# Altium PCB PCB2.PcbDoc
Units mil, origin at the board's own origin, x right, y up, seen from the top; angles counter-clockwise.
Board outline 6000 x 4000 mil, 2 copper layers (Top Layer, Bottom Layer); 11 components, 7 nets, 34 pads, 0 vias.
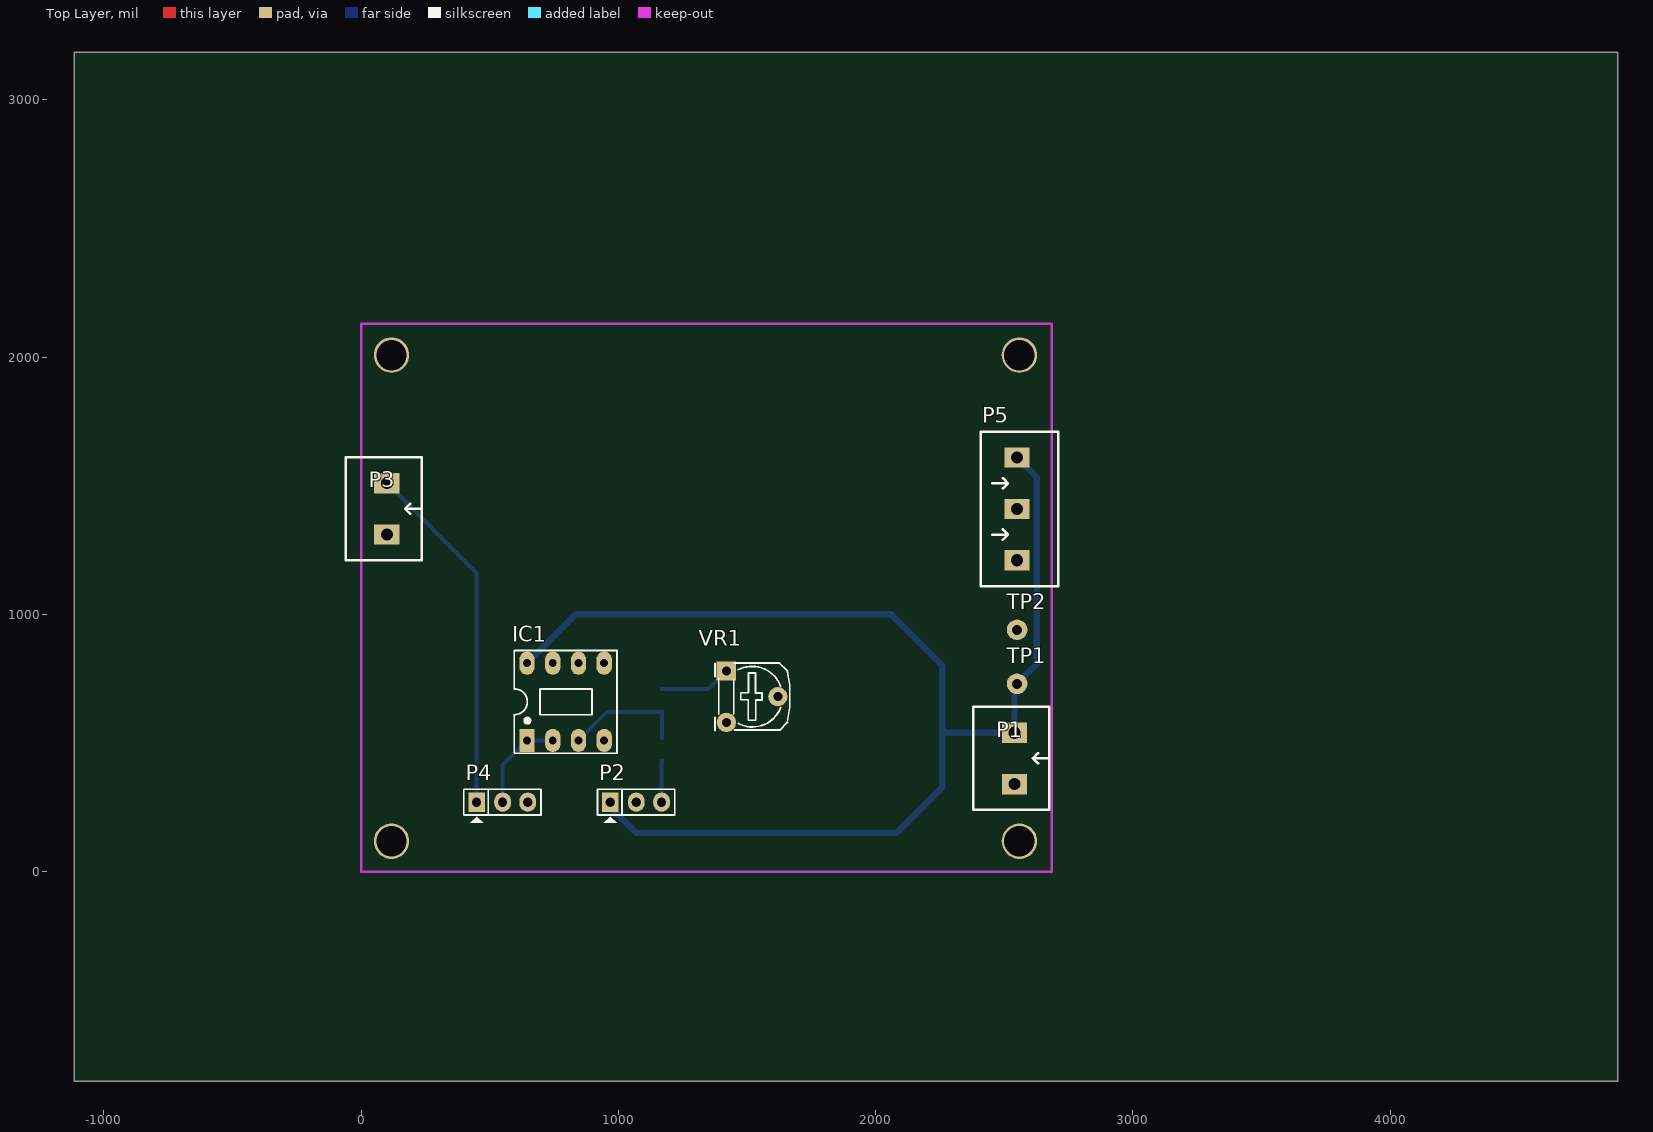
[diagram p0: Top Layer view]
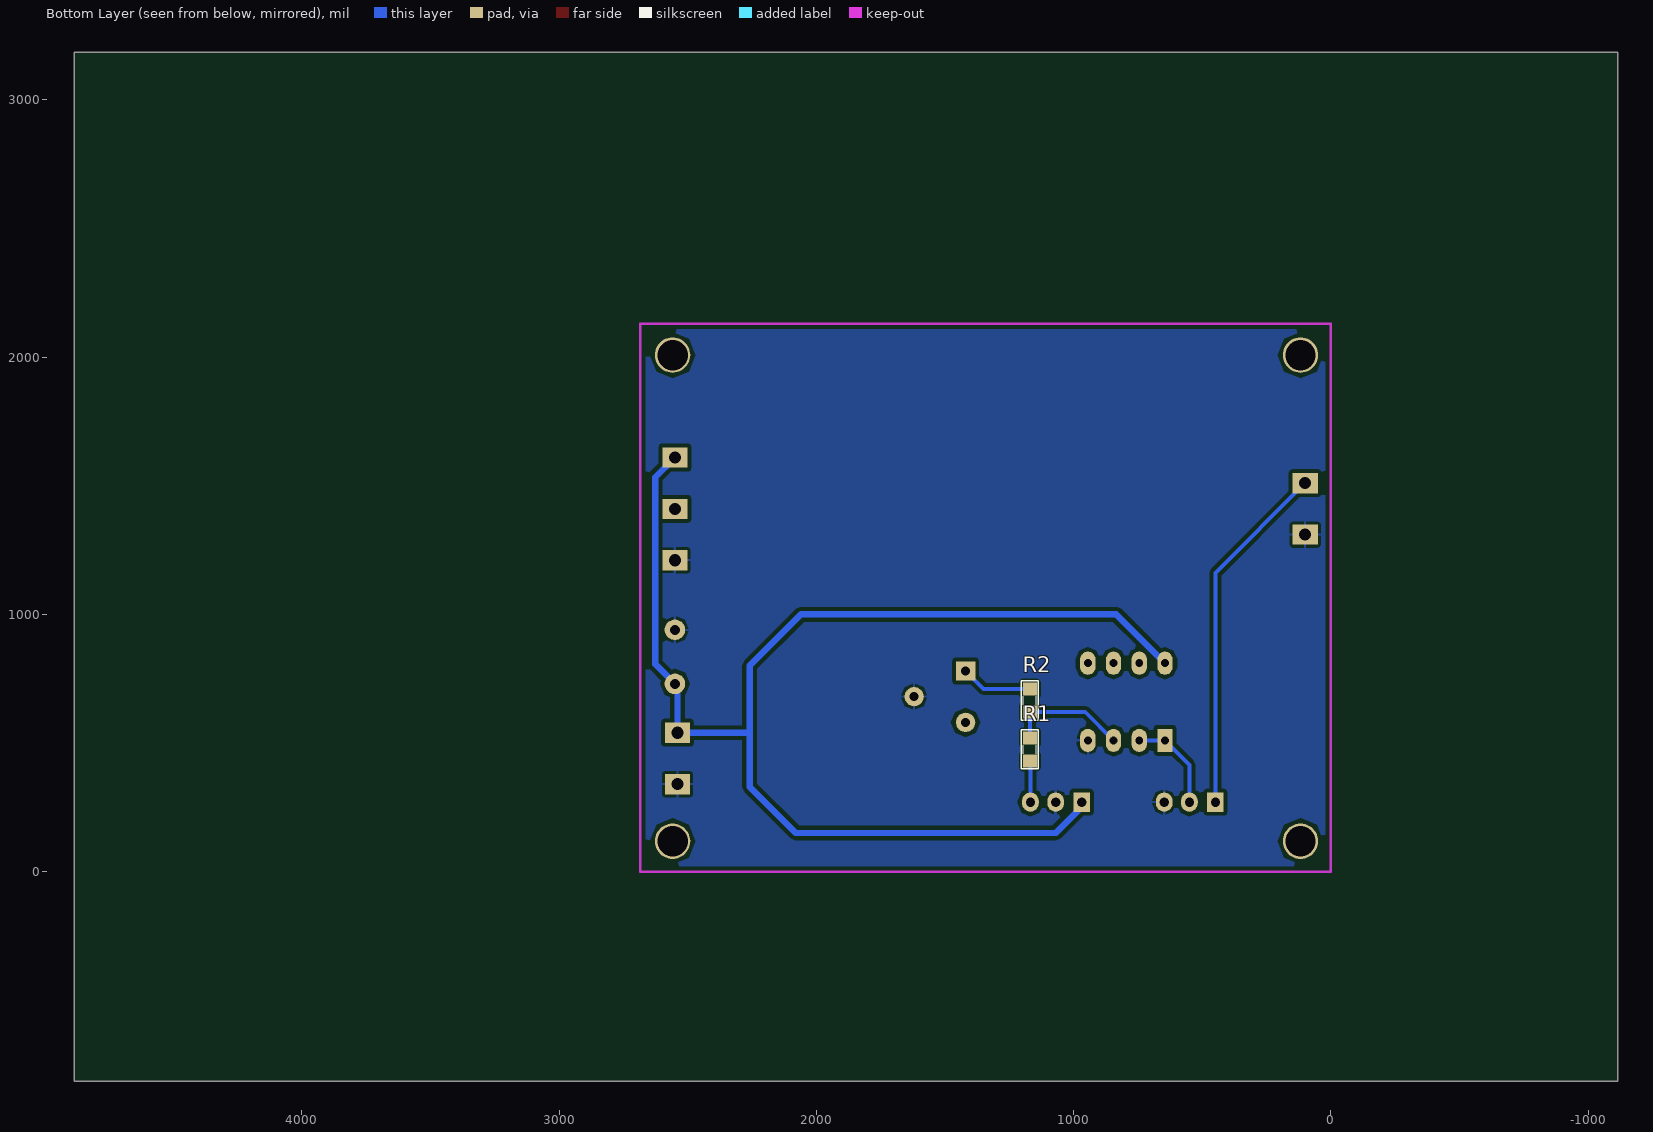
[diagram p1: Bottom Layer view, seen from below]
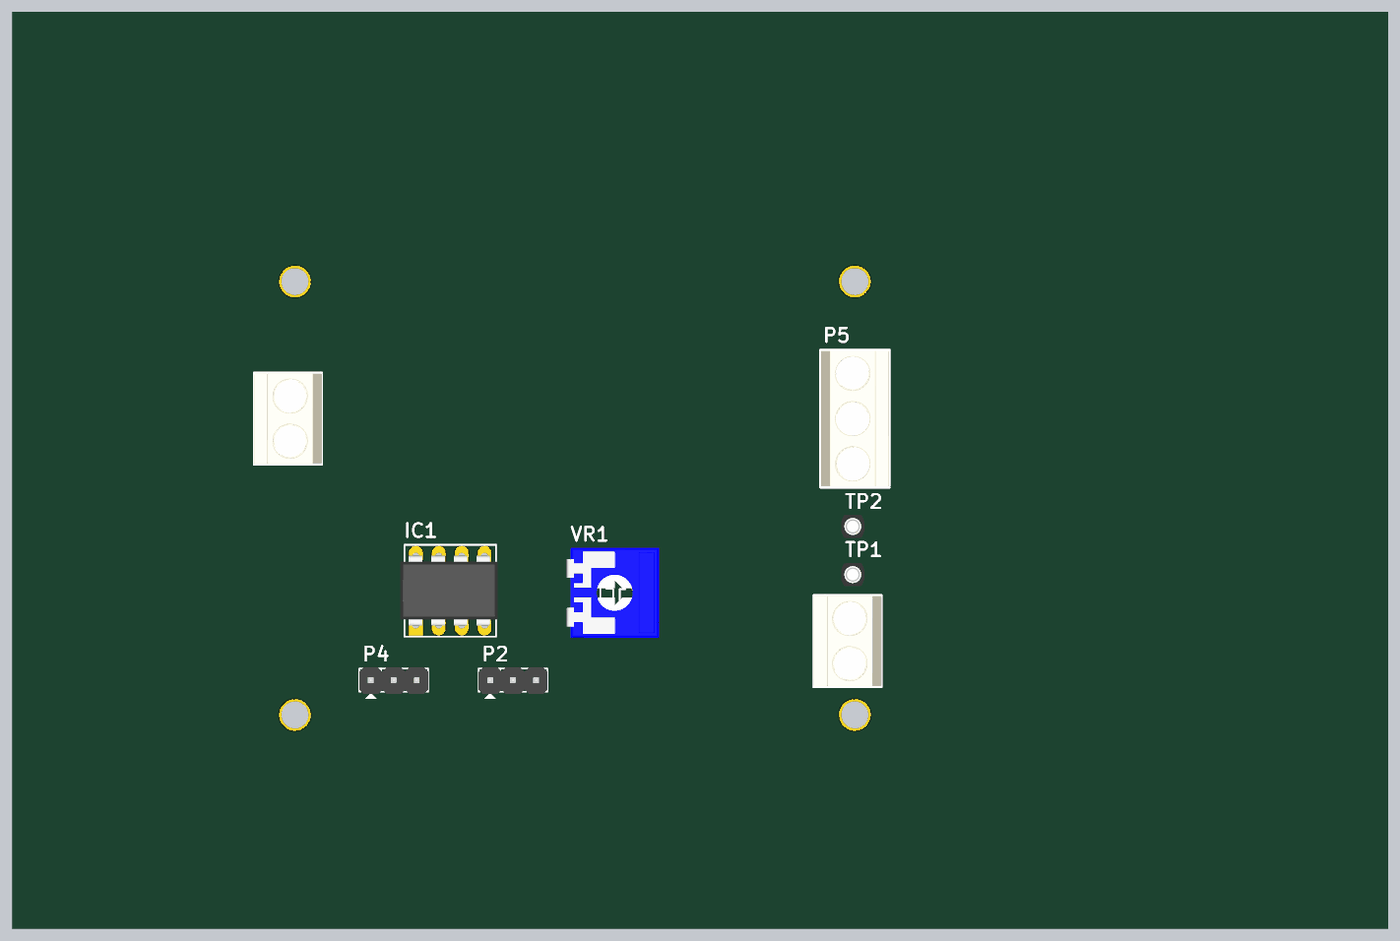
[diagram p2: 3D render of the assembled board from above, using the file's embedded part models]

## Layer stack, top to bottom
Top Solder: solder mask 0.4, Solder Resist, Dk 3.5
Top Layer: signal copper 1.4
Dielectric 1: dielectric 12.6, FR-4, Dk 4.8
Bottom Layer: signal copper 1.4
Bottom Solder: solder mask 0.4, Solder Resist, Dk 3.5

## Board outline
-1115,-815 4885,-815 4885,3185 -1115,3185

## Design rules (kind name [scope] priority, off if disabled: settings)
Clearance [All] p1: gap=15 ignorepadtopadclearanceinfootprint=FALSE except(0: Arc-Hole Track-Hole SMDPad-Hole THPad-Hole Via-Hole Fill-Hole Poly-Hole Region-Hole Text-Hole)
PolygonConnect [All] p1: connectstyle=Relief reliefconductorwidth=10 reliefentries=4 polygonreliefangle="90 Angle" airgapwidth=10
RoutingVias [All] p1: holewidth=28 width=50 viastyle="Through Hole" minholewidth=28 minwidth=50 maxholewidth=28 maxwidth=50
SolderMaskExpansion [All] p1: expansion=4
Width [All] p1: maxlimit=25 minlimit=10 preferedwidth=15 minimp=50.000000 maximp=50.000000 favimp=50.000000
30 further rules are at their usual default settings.

## Components (designator, comment, footprint, x,y, rotation, side; value= is the part's Value field where it differs from the comment)
IC1 "LM358" DIP8 790,660 r0 top
P1 "Domino 2" "DOMINO 2- 5mm" 2540,440 r270 top
P2 "Header 3" JP3 1069,270 r0 top
P3 "Domino 2" "DOMINO 2- 5mm" 100,1410 r270 top
P4 "Header 3" JP3 549,270 r0 top
P5 "Domino 3" "DOMINO 3-5mm" 2550,1610 r270 top
R1 "RESISTOR SMD" RES-SM-0805 1170,520 r270 bottom value=2.2k
R2 "RESISTOR SMD" RES-SM-0805 1170,710 r270 bottom value=830
TP1 "Test Point" TP 2550,730 r0 top
TP2 "Test Point" TP 2550,940 r0 top
VR1 "10K" "Varistor 1" 1420,780 r270 top value="VR 10K"

## Footprints (in the part's own frame and the unit in brackets; to place one, negate y for a bottom-side part, rotate by r counter-clockwise, add the part's x,y. Pads: shape width x height; smd on the part's side, far side on the other; paste and mask are expansions set on the pad)
DIP8 [mil] "DIP, 8-Leads, Row Spacing 7.62mm, Pitch 2.54mm, Body 9.91x6.73mm"
  rect 60x90 hole 31: 1(-145,-150)
  oval 60x90 hole 31: 2(-45,-150) 3(55,-150) 4(155,-150) 5(155,150) 6(55,150) 7(-45,150) 8(-145,150)
  silkscreen extent -195,-200 205,200, body extent -213,-153 213,153, height 177
"DOMINO 2- 5mm" [mm]
  rect 2x2.5 hole 1.2: 1(-2.54,0) 2(2.54,0)
  silkscreen extent -5.08,-4.08 5.08,3.43, body extent -5,-4.07 5,3.43, height 10
"DOMINO 3-5mm" [mm]
  rect 2x2.5 hole 1.2: 1(0,0) 2(5.08,0) 3(10.147,0)
  silkscreen extent -2.54,-3.58 12.7,4.06, body extent -2.42,-3.51 12.58,3.99, height 10
JP3 [mil] "Jumper 3"
  rect 65x75 hole 36: 1(-100,0)
  oval 65x75 hole 36: 2(1,0) 3(99,0)
  silkscreen extent -150,-81 150,50, body extent -150,-60 150,55, height 355
RES-SM-0805 [mil]
  rect 50x55 smd: 1(0,0) 2(90,0)
  silkscreen extent -32,-34 121,33, body extent 6,-25 84,25, height 31
TP [mil] "Connect 1"
  round 80 hole 39: TP1(0,0)
  body extent -50,-50 50,50, height 179
"Varistor 1" [mil] "Resistor Variable"
  rect 75x75 hole 35: 1(0,0)
  round 75 hole 35: 2(100,200) 3(200,0)
  silkscreen extent -31,-44 231,246, body extent -68,-117 326,285, height 165

## Part data
IC1: "Low-Power Dual Operational Amplifier"
P1 P3: "Domino, 2-Pin", LatestRevisionDate=17-Jul-2002, LatestRevisionNote="Re-released for DXP Platform.", Publisher="Altium Limited"
P2 P4: "Header, 3-Pin", LatestRevisionDate=17-Jul-2002, LatestRevisionNote="Re-released for DXP Platform.", Publisher="Altium Limited"
P5: "Domino 3-Pin", LatestRevisionDate=17-Jul-2002, LatestRevisionNote="Re-released for DXP Platform.", Publisher="Altium Limited"
R1 R2: "Resistor"
VR1: library part "Var Resistor", "Var Resistor"

## Free pads (board coordinates)
  round 137.8 hole 118.11: 2(118.11,118.11) 2(118.11,2007.87) 2(2559.06,118.11) 2(2559.06,2007.87)

## Nets (pads, with @x,y where several pads share a name; then routed paths per layer and width w, separated by ;. In a path a pad name is that pad's centre, name@x,y a point inside that pad or via, vN(x,y) a via of type N, cw(c..) or ccw(c..) an arc to the next point about the centre after c; other vN are vias at no path point)
12V: IC1.8 P1.1 P2.1 P5.1 TP1.TP1 | length 5090.6
  Bottom Layer w25: IC1.8 835,1000 2060,1000 2260,800 2260,540 ; P2.1 969,251 1070,150 2080,150 2260,330 2260,540 ; P5.1 2626.71,1533.29 2626.71,806.71 TP1.TP1 2540,720 P1.1 2260,540
GND: IC1.4 P1.2 P2.2 P3.2 P4.3 P5.3 TP2.TP1 VR1.2
NetIC1_3: IC1.3 R1.1 R2.2 | length 470.6
  Bottom Layer w15: IC1.3 955,620 R2.2 R1.1
NetR2_1: R2.1 VR1.1 | length 279
  Bottom Layer w15: R2.1 1350,710 VR1.1
SENOUT: P2.3 R1.2 | length 160.8
  Bottom Layer w15: P2.3 1168,428 R1.2
STMIN: IC1.1 IC1.2 P4.2 | length 379.4
  Bottom Layer w15: P4.2 550,415 IC1.1 IC1.2
STMOUT: P3.1 P4.1 | length 1384.6
  Bottom Layer w15: P3.1 449,1161 P4.1
pads on no net: IC1.5 IC1.6 IC1.7 P5.2 VR1.3

## Polygon pours and split planes (outlines as drawn)
GND on Bottom Layer "GND" (solid, remove dead copper, pour order 2): -80,2200 2790,2200 2790,-120 2770,-100 -50,-100

## Keep-outs
Keep-Out Layer:
  lines w10: 0,0 0,400 0,2130 2685,2130 2685,0 0,0